# Altium PCB arduino_nano_min_sys.PcbDoc
Units mil, origin at the board's own origin, x right, y up, seen from the top; angles counter-clockwise.
Board outline 1755 x 3095 mil, 4 copper layers (Top Layer, GND_plane, 5V_plane, Bottom Layer), stack 23.756 mil thick; 34 components, 43 nets, 170 pads, 89 vias.
Unrouted connection lines stored in the file: 28.
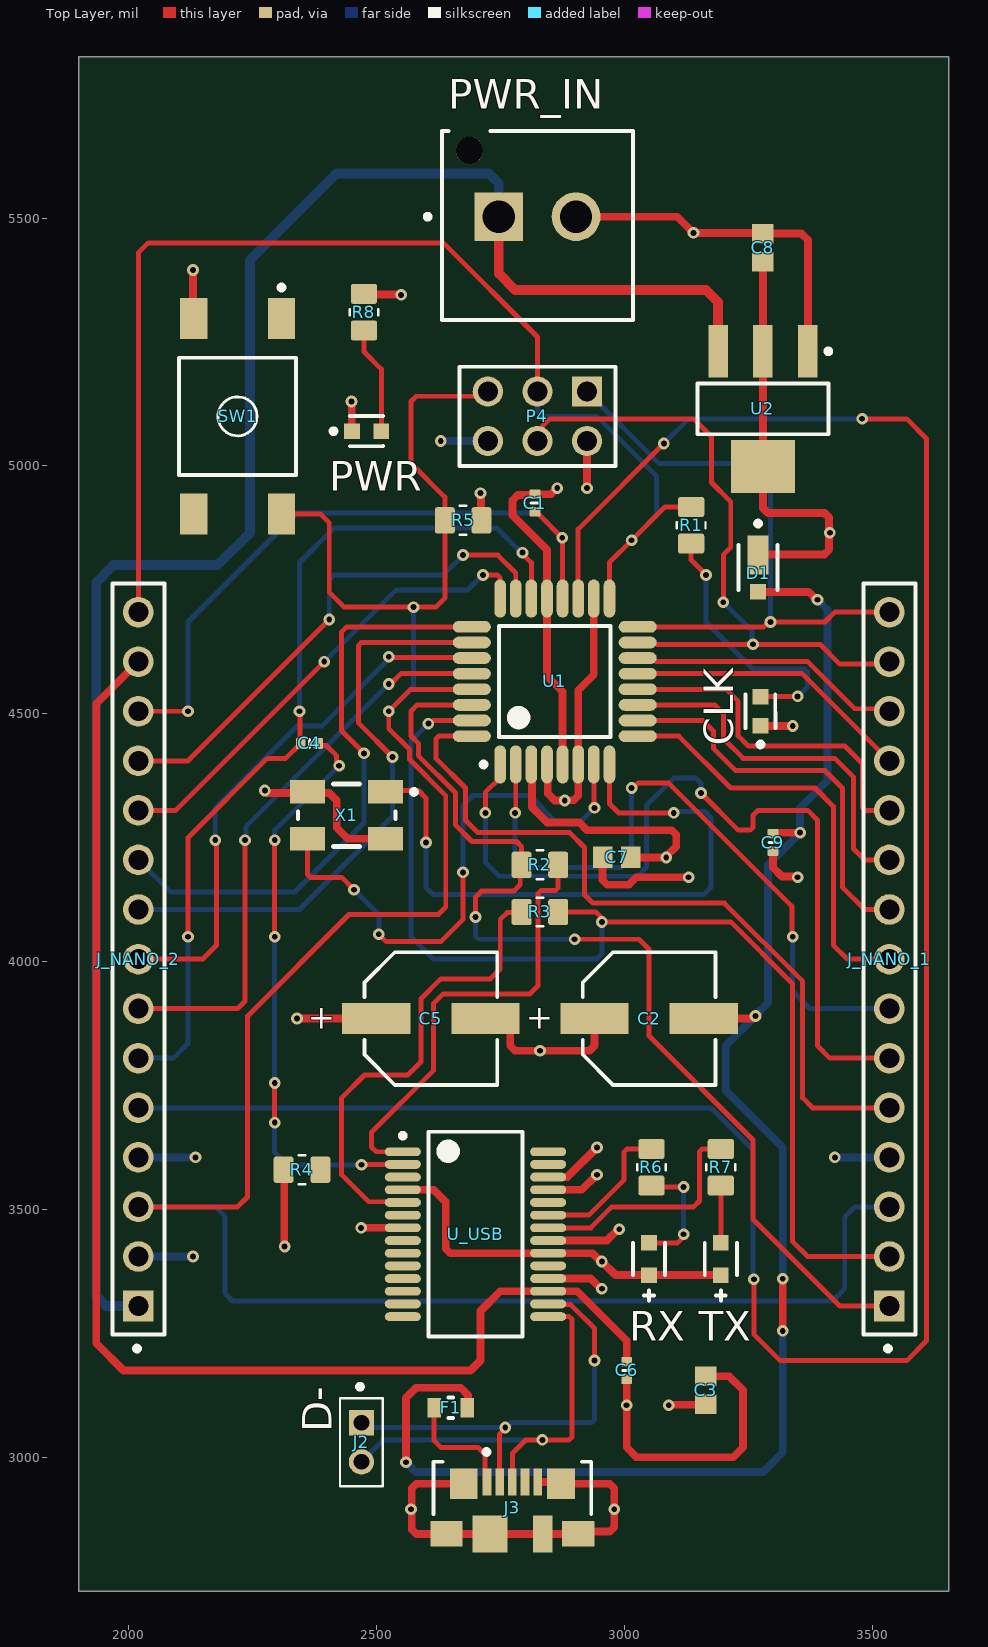
[diagram p0: Top Layer view]
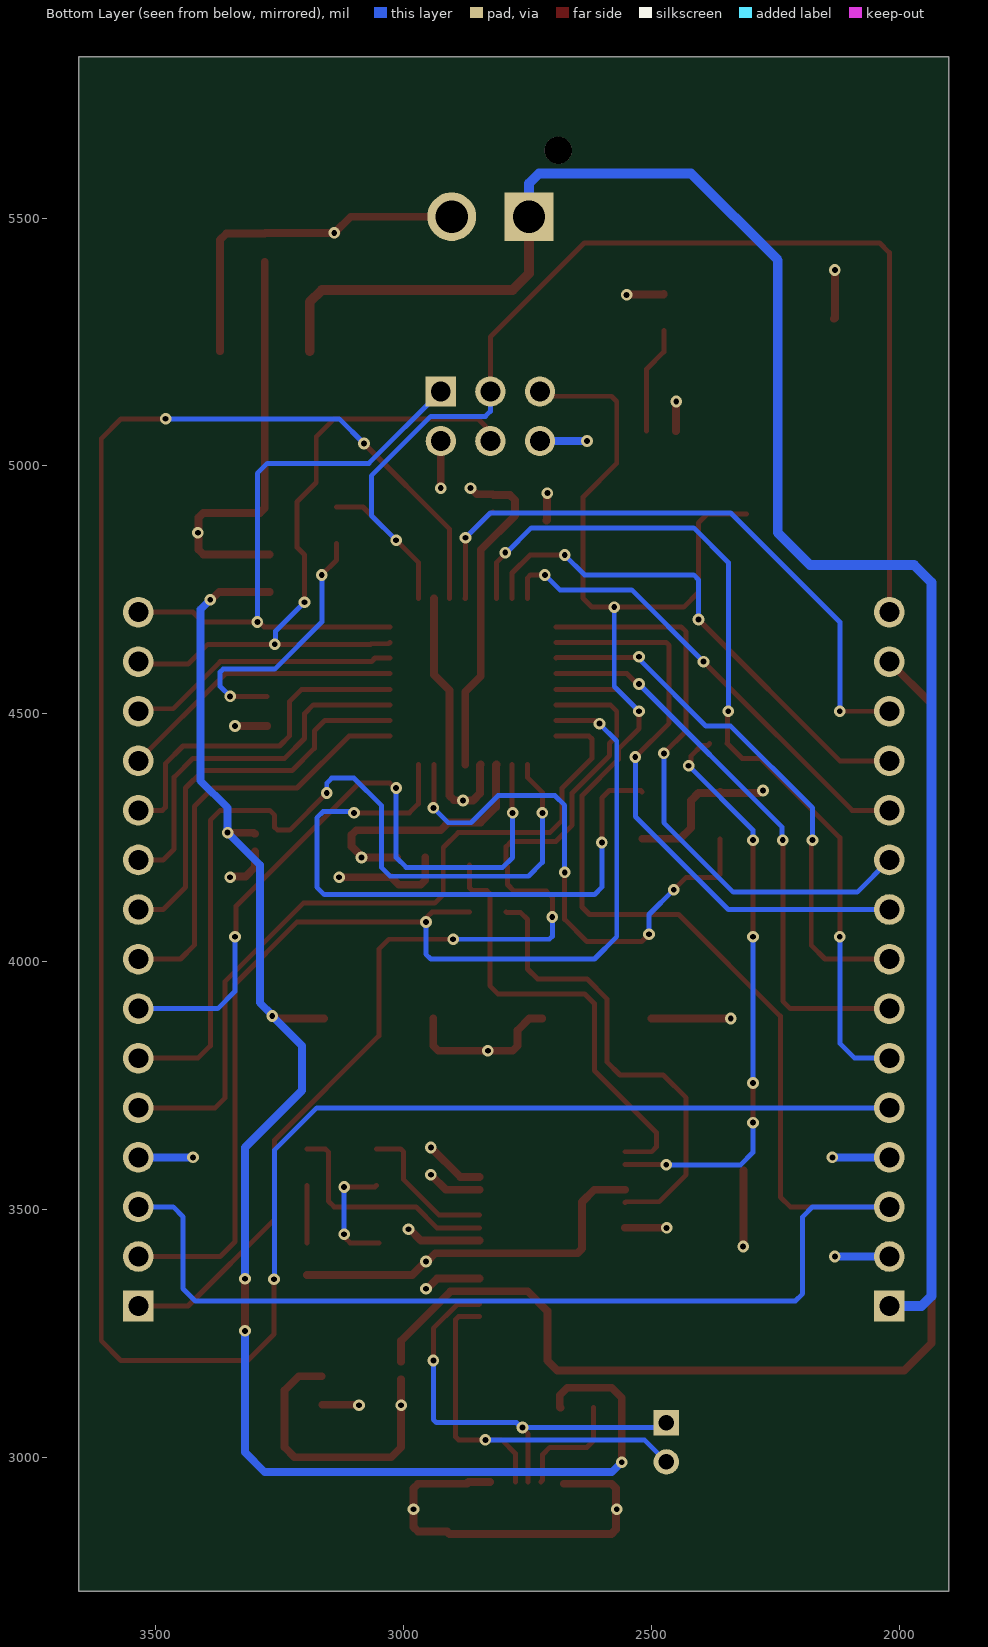
[diagram p1: Bottom Layer view, seen from below]
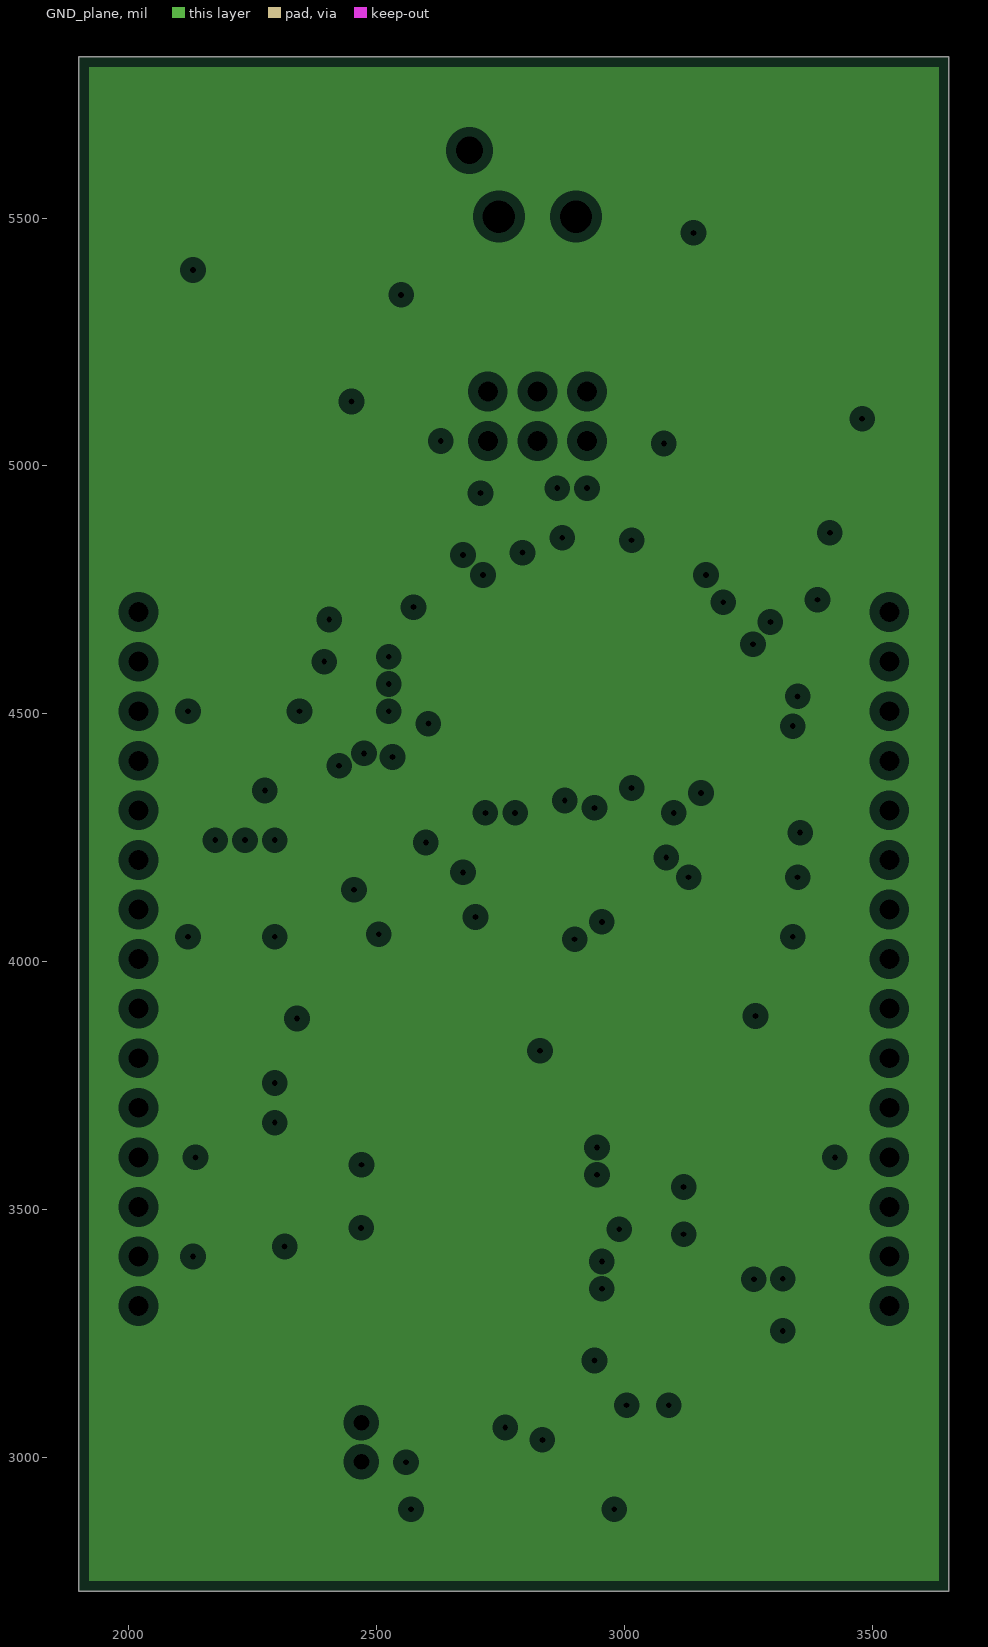
[diagram p2: GND_plane, clearances drawn from the general rule]
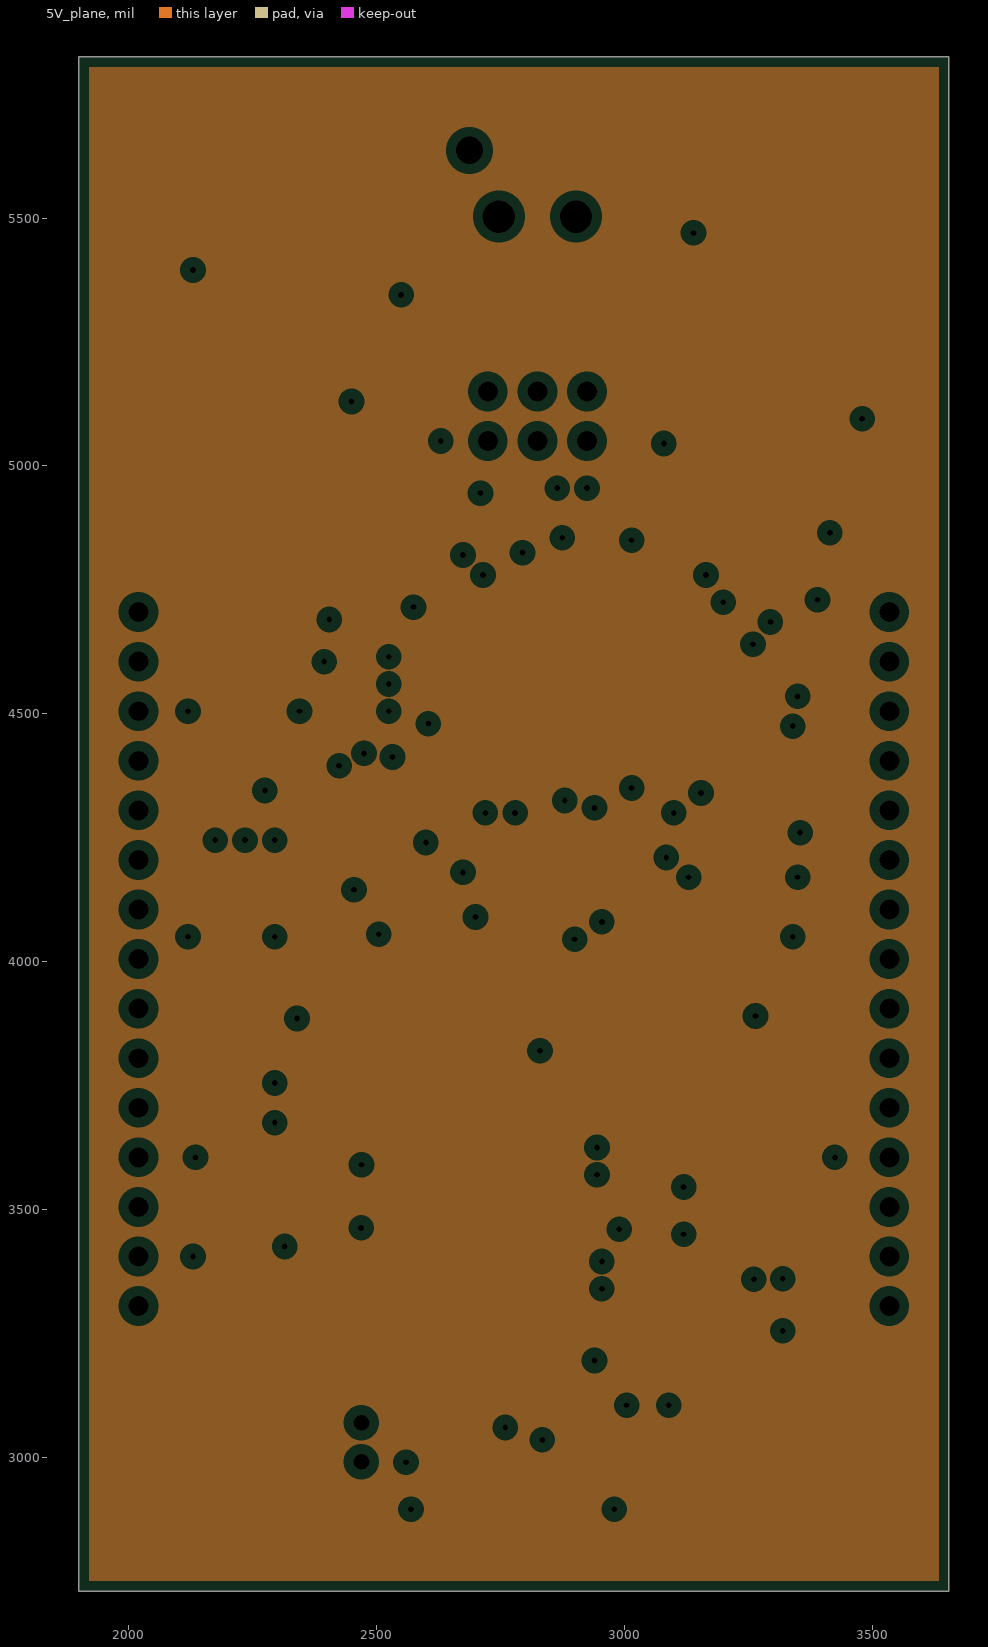
[diagram p3: 5V_plane, clearances drawn from the general rule]
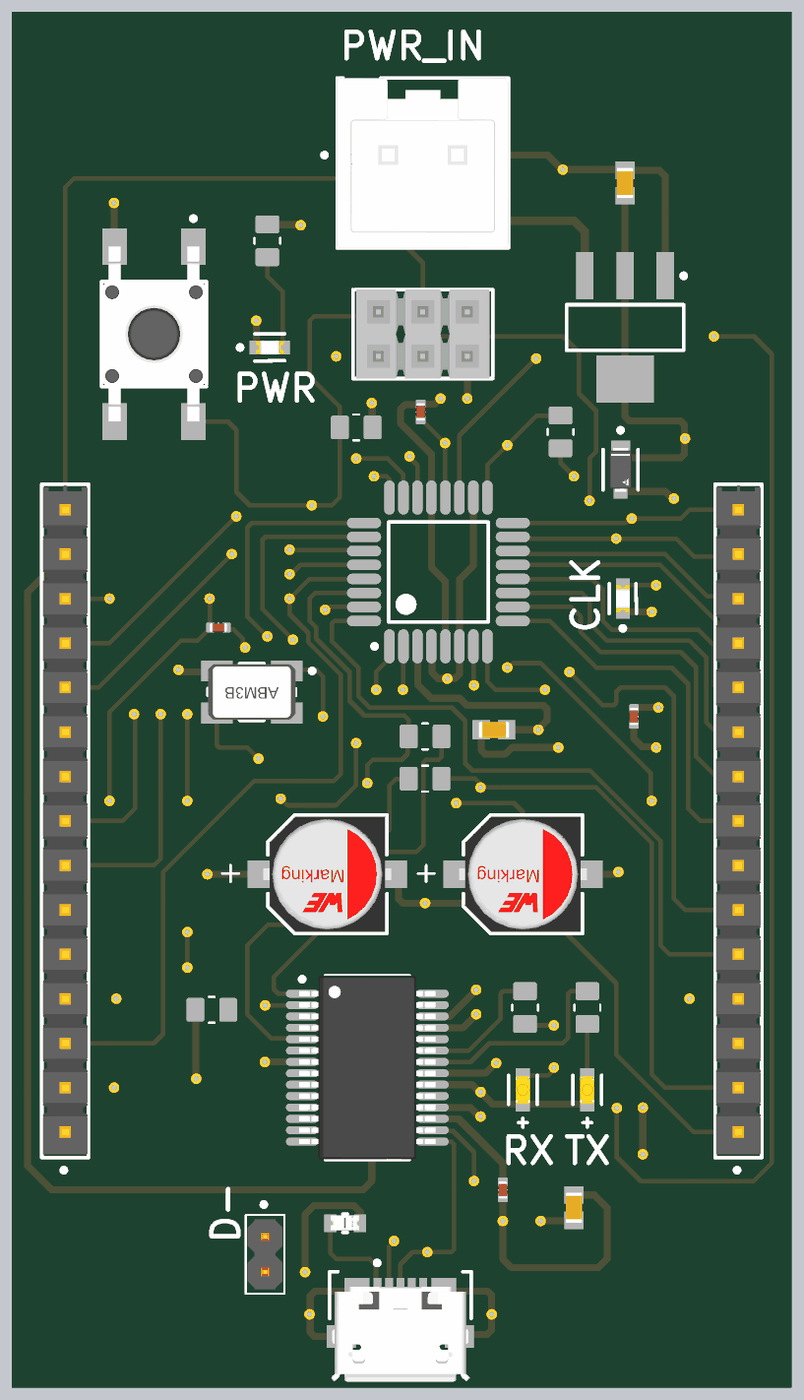
[diagram p4: 3D render of the assembled board from above, using the file's embedded part models]

## Layer stack, top to bottom
Top Solder: solder mask 0.4, Solder Resist, Dk 3.5
Top Layer: signal copper 1.4
Dielectric 2: prepreg 2.8, PP-006, Dk 4.1
GND_plane: plane copper 1.378, net GND
Dielectric 1: dielectric 12.6, FR-4, Dk 4.8
5V_plane: plane copper 1.378, net +5V
Dielectric 3: prepreg 2.8, PP-006, Dk 4.1
Bottom Layer: signal copper 1.4
Bottom Solder: solder mask 0.4, Solder Resist, Dk 3.5

## Board outline
1900,2730 1900,5825 3655,5825 3655,2730

## Design rules (kind name [scope] priority, off if disabled: settings)
AssemblyTestPointUsage [All] p1: isadvanced=TRUE
AssemblyTestpoint [All] p1: isadvanced=TRUE testpointundercomponent=TRUE minsize=40 maxsize=100 preferedsize=60 minholesize=0 maxholesize=40 preferedholesize=32 testpointgrid=1 usegrid=TRUE gridtolerance=0.01 allowsidetop=TRUE allowsidebottom=TRUE
Clearance Clearance_1 [OnMid vs OnMid] p1: gap=7.87 ignorepadtopadclearanceinfootprint=FALSE sourcerule=46 cellrowname=All cellrowtype=0 cellcolname=All cellcoltype=0 innerlayers=TRUE
Clearance Clearance_2 [(ExistsOnLayer('Top Layer') Or ExistsOnLayer('Bottom Layer')) vs (ExistsOnLayer('Top Layer') Or ExistsOnLayer('Bottom Layer'))] p2: gap=7.87 ignorepadtopadclearanceinfootprint=FALSE sourcerule=46 cellrowname=All cellrowtype=0 cellcolname=All cellcoltype=0 outerlayers=TRUE
Clearance [All] p3: gap=10 ignorepadtopadclearanceinfootprint=FALSE ismatrix=TRUE
ComponentClearance [All] p1: isadvanced=TRUE gap=10 collisioncheckmode=3 verticalgap=10 showdistances=FALSE
FabricationTestPointUsage [All] p1: isadvanced=TRUE valid=0 allowmultiple=FALSE
FabricationTestpoint [All] p1: isadvanced=TRUE side=3 testpointundercomponent=TRUE minsize=40 maxsize=100 preferedsize=60 minholesize=0 maxholesize=40 preferedholesize=32 testpointgrid=1 allowsidetop=TRUE allowsidebottom=TRUE usegrid=TRUE gridtolerance=0.01
FanoutControl Fanout_BGA [IsBGA] p1: isadvanced=TRUE bgadir=Out bgaviamode=Centered fanoutstyle=Auto fanoutdirection=Alternating viagrid=1 // Fanout_BGA (Default Rule)
FanoutControl Fanout_LCC [IsLCC] p2: isadvanced=TRUE bgadir=Out bgaviamode=Centered fanoutstyle=Auto fanoutdirection=Alternating viagrid=1 // Fanout_LCC (Default Rule)
FanoutControl Fanout_SOIC [IsSOIC] p3: isadvanced=TRUE bgadir=Out bgaviamode=Centered fanoutstyle=Auto fanoutdirection=Alternating viagrid=1 // Fanout_SOIC (Default Rule)
FanoutControl Fanout_Small [(CompPinCount < 5)] p4: isadvanced=TRUE bgadir=Out bgaviamode=Centered fanoutstyle=Auto fanoutdirection=OutThenIn viagrid=1 // Fanout_Small (Default Rule)
FanoutControl Fanout_Default [All] p5: isadvanced=TRUE bgadir=Out bgaviamode=Centered fanoutstyle=Auto fanoutdirection=Alternating viagrid=1 // Fanout_Default (Default Rule)
Height [All] p1: isadvanced=TRUE minheight=0 maxheight=1000 prefheight=500
HoleSize [All] p1: isadvanced=TRUE absolutevalues=TRUE maxlimit=100 minlimit=1 maxpercent=80.000 minpercent=20.000
HoleToHoleClearance [All] p1: isadvanced=TRUE gap=10 allowstackedmicrovias=TRUE
LayerPairs [All] p1: isadvanced=TRUE enforce=TRUE
MinimumSolderMaskSliver [All] p1: isadvanced=TRUE minsoldermaskwidth=10
NetAntennae [All] p1: isadvanced=TRUE netantennaetolerance=0
PasteMaskExpansion [All] p1: isadvanced=TRUE expansion=0
PlaneClearance [All] p1: isadvanced=TRUE clearance=20
PlaneConnect [All] p1: isadvanced=TRUE planeconnectstyle=Relief reliefexpansion=20 reliefentries=4 reliefconductorwidth=10 reliefairgap=10
PolygonConnect [All] p1: connectstyle=Relief reliefconductorwidth=10 reliefentries=4 polygonreliefangle="90 Angle" airgapwidth=10
RoutingCorners [All] p1: isadvanced=TRUE cornerstyle=45-Degree minsetback=100 maxsetback=100
RoutingPriority [All] p1: isadvanced=TRUE routingpriority=0
RoutingVias [All] p1: holewidth=11.81 width=23.62 viastyle="Through Hole" minholewidth=7.87 minwidth=15.75 maxholewidth=31.5 maxwidth=39.37
ShortCircuit [All] p1: isadvanced=TRUE allowed=FALSE
SilkToSilkClearance [All] p1: isadvanced=TRUE silktosilkclearance=10
SilkToSolderMaskClearance [IsPad] p1: isadvanced=TRUE minsilkscreentomaskgap=10 clearancetoexposedcopper=TRUE
SolderMaskExpansion [All] p1: isadvanced=TRUE expansion=0 istentingtop=FALSE
SupplyNets "Schematic Supply Nets_4" [InNet('+5V')] p1: isadvanced=TRUE voltage=0.000
SupplyNets "Schematic Supply Nets_3" [InNet('GND')] p2: isadvanced=TRUE voltage=0.000
SupplyNets "Schematic Supply Nets_2" [InNet('VIN')] p3: isadvanced=TRUE voltage=0.000
SupplyNets "Schematic Supply Nets_1" [InNet('3V3')] p4: isadvanced=TRUE voltage=0.000
SupplyNets "Schematic Supply Nets" [InNet('VUSB')] p5: isadvanced=TRUE voltage=0.000
UnRoutedNet [All] p1: isadvanced=TRUE
UnpouredPolygon [All] p1: isadvanced=TRUE
Width MaxMinWidth_1 [InNet('+5V')] p1: maxlimit=31.5 minlimit=11.81 preferedwidth=15.75 minimp=50.000000 maximp=50.000000 favimp=50.000000
Width MaxMinWidth_2 [InNet('3V3')] p2: maxlimit=31.5 minlimit=11.81 preferedwidth=15.75 minimp=50.000000 maximp=50.000000 favimp=50.000000
Width MaxMinWidth_3 [InNet('GND')] p3: maxlimit=31.5 minlimit=11.81 preferedwidth=15.75 minimp=50.000000 maximp=50.000000 favimp=50.000000
Width MaxMinWidth_4 [InNet('VIN')] p4: maxlimit=23.62 minlimit=11.81 preferedwidth=19.68 minimp=50.000000 maximp=50.000000 favimp=50.000000
Width MaxMinWidth_5 [InNet('VUSB')] p5: maxlimit=23.62 minlimit=11.81 preferedwidth=15.75 minimp=50.000000 maximp=50.000000 favimp=50.000000
Width [All] p6: maxlimit=10 minlimit=10 preferedwidth=10
4 further rules are at their usual default settings.

## Classes and differential pairs
component class U_USB: C4 C6 F1 J2 J3 R6 R7 RX TX U_USB
component class U_connector: J_NANO_1 J_NANO_2
component class U_arduino_nano: C1 C2 C3 C5 C7 C8 C9 CLK D1 P4 PWR_IN R1 R2 R3 R4 R5 R8 SW1 U1 U2 X1

## Components (designator, comment, footprint, x,y, rotation, side; value= is the part's Value field where it differs from the comment)
C1 "Capacitor 100nF +/-20% 25V 0402" CAPC0402(1005)60_L 2820,4925 r270 top value=100nF
C2 "4.7 uF" WCAP-ASLU_D6.3H5.5 3050.24,3885 r180 top
C3 "Capacitor 1uF +/- 10% 16V 0603" CAPC1608X90X35ML15T15 3165,3135 r90 top value=1µF
C4 "Capacitor 100nF +/-20% 25V 0402" CAPC0402(1005)60_L 2365,4440 r180 top value=100nF
C5 "4.7 uF" WCAP-ASLU_D6.3H5.5 2610,3885 r180 top
C6 "Capacitor 100nF +/-20% 25V 0402" CAPC0402(1005)60_L 3005,3175 r270 top value=100nF
C7 "Capacitor 1uF +/- 10% 16V 0603" CAPC1608X90X35ML15T15 2985,4210 r0 top value=1µF
C8 "Capacitor 1uF +/- 10% 16V 0603" CAPC1608X90X35ML15T15 3280,5440 r270 top value=1µF
C9 "Capacitor 100nF +/-20% 25V 0402" CAPC0402(1005)60_L 3300,4240 r270 top value=100nF
CLK "" FP-5973901831F-MFG 3275,4505 r90 top
D1 "MSS1P3L-M3/89A" FP-96591-MFG 3270,4795 r270 top value=65pF
F1 "MF-FSMF050X-2" FP-MF-FSMF-MFG 2650,3100 r0 top value=0.1-0.8Ω
J2 "NRPN021PAEN-RC" NRPN021PAEN-RC_MFG 2470,3030 r270 top
J3 "473460001" FP-473460001-MFG 2774.41,2859.06 r0 top
J_NANO_1 "TSW-115-07-G-S" FP-TSW-115-07-G-S-MFG 3535,4005 r270 top
J_NANO_2 "TSW-115-07-G-S" FP-TSW-115-07-G-S-MFG 2020,4005 r270 top
P4 "TSW-103-08-T-D" SMTC-TSW-103-08-X-D 2925,5150 r180 top
PWR "" FP-5973901831F-MFG 2480.47,5070 r0 top
PWR_IN "B2P-VH-FB-B(LF)(SN)" FP-B2P-VH-FB-B_LF_SN-MFG 2825,5485 r180 top
R1 "ERJP06J102V_with_model" RESC2012X70N 3135,4880 r270 top value=1k
R2 "ERJP06J102V_with_model" RESC2012X70N 2830,4195 r0 top value=1k
R3 "ERJP06J102V_with_model" RESC2012X70N 2830,4100 r180 top value=1k
R4 "ERJP06J102V_with_model" RESC2012X70N 2350,3580 r0 top value=1k
R5 "ERJP06J102V_with_model" RESC2012X70N 2675,4890 r0 top value=1k
R6 "ERJP06J102V_with_model" RESC2012X70N 3055,3585 r90 top value=1k
R7 "ERJP06J102V_with_model" RESC2012X70N 3195,3585 r90 top value=1k
R8 "ERJP06J102V_with_model" RESC2012X70N 2475,5310 r270 top value=1k
RX "" FP-APTD1608SYC-J3-MFG 3050,3400 r270 top
SW1 "1301.9320" FP-1301_9320-MFG 2220,5100 r270 top
TX "" FP-APTD1608SYC-J3-MFG 3195,3400 r270 top
U1 "ATmega328P-AU" 32A_M 2860,4565 r90 top
U2 "LM1117IMPX-5.0/NOPB" MP04A_M 3280,5115 r270 top
U_USB "FT232RL" FTDI-SSOP-28_M 2700,3450 r0 top
X1 "ABM3B-16.000MHZ-B2-T" ABRA-ABM3B-4_V 2440,4295 r180 top

## Footprints (in the part's own frame and the unit in brackets; to place one, negate y for a bottom-side part, rotate by r counter-clockwise, add the part's x,y. Pads: shape width x height; smd on the part's side, far side on the other; paste and mask are expansions set on the pad)
32A_M [mm] "Thin QFP, 32-Leads, Body 7x7mm, Pitch 0.8mm, IPC Low Density"
  oval 1.95x0.6 smd: 1(-4.25,2.8) 2(-4.25,2) 3(-4.25,1.2) 4(-4.25,0.4) 5(-4.25,-0.4) 6(-4.25,-1.2) 7(-4.25,-2) 8(-4.25,-2.8) 17(4.25,-2.8) 18(4.25,-2) 19(4.25,-1.2) 20(4.25,-0.4) 21(4.25,0.4) 22(4.25,1.2) 23(4.25,2) 24(4.25,2.8)
  oval 0.6x1.95 smd: 9(-2.8,-4.25) 10(-2,-4.25) 11(-1.2,-4.25) 12(-0.4,-4.25) 13(0.4,-4.25) 14(1.2,-4.25) 15(2,-4.25) 16(2.8,-4.25) 25(2.8,4.25) 26(2,4.25) 27(1.2,4.25) 28(0.4,4.25) 29(-0.4,4.25) 30(-1.2,4.25) 31(-2,4.25) 32(-2.8,4.25)
  silkscreen extent -4.37,-2.85 2.85,3.77, body extent -3.5,-3.5 3.5,3.5, height 1.2
ABRA-ABM3B-4_V [mm] "SMD, 4-Leads, Body 5x3.2mm"
  rect 1.8x1.2 smd: 1(-2,-1.2) 2(2,-1.2) 3(2,1.2) 4(-2,1.2)
  silkscreen extent -3.58,-1.6 2.5,1.6, body extent -2.5,-1.59 2.5,1.59, height 1.13
CAPC0402(1005)60_L [mm] "Chip Capacitor, Body 1.0x0.5mm, Height 0.6mm, IPC High Density"
  rrect25% 0.5x0.55 smd: 1(-0.45,0) 2(0.45,0)
  silkscreen extent 0,-0.2 0,0.2, body extent -0.5,-0.25 0.5,0.25, height 0.6
CAPC1608X90X35ML15T15 [mm] "Chip Capacitor, 2-Leads, Body 1.75x0.95mm, IPC Low Density"
  rect 1x1.1 smd: 1(-0.725,0) 2(0.725,0)
  body extent -0.87,-0.48 0.87,0.48, height 0.9
FP-1301_9320-MFG [mm]
  rect 2.1x1.4 smd paste+0 mask+0: 1(-5,2.25) 2(5,2.25) 3(-5,-2.25) 4(5,-2.25)
  silkscreen extent -6.72,-3 3,3, body extent -6.15,-3.1 6.15,3.1, height 0.25
FP-96591-MFG [mm]
  rect 2x1.1 smd paste+0 mask+0: 1(-0.65,0)
  rect 0.8x0.8 smd paste+0 mask+0: 2(1.25,0)
  silkscreen extent -2.37,-1 1.15,1, body extent -1.75,-0.8 1.75,0.8, height 0.25
FP-473460001-MFG [mm]
  rect 0.45x1.38 smd paste+0 mask+0: 1(-1.3,2.31) 2(-0.65,2.31) 3(0,2.31) 4(0.65,2.31) 5(1.3,2.31)
  rect 1.425x1.55 smd paste+0 mask+0: 6(-2.488,2.225) 7(2.488,2.225)
  rect 1.65x1.3 smd paste+0 mask+0: 8(-3.375,-0.35) 11(3.375,-0.35)
  rect 1.8x1.9 smd paste+0 mask+0: 9(-1.15,-0.35)
  rect 1x1.9 smd paste+0 mask+0: 10(1.55,-0.35)
  silkscreen extent -4.05,0.67 4.05,3.97, body extent -4.3,-2.48 4.3,3.45, height 0.25
FP-5973901831F-MFG [mm]
  rect 0.8x0.8 smd paste+0 mask+0: 1(-0.75,0) 2(0.75,0)
  silkscreen extent -1.82,-0.77 0.85,0.77, body extent -1.25,-0.56 1.25,0.56, height 0.25
FP-APTD1608SYC-J3-MFG [mm]
  rect 0.8x0.8 smd paste+0 mask+0: 1(-0.825,0) 2(0.825,0)
  silkscreen extent -0.82,-0.82 2.12,0.82, body extent -1.33,-0.58 1.33,0.58, height 0.25
FP-B2P-VH-FB-B_LF_SN-MFG [mm]
  rect 2.5x2.5 hole 1.65 paste-2539.97 mask+0: 1(1.98,-0.45)
  round 2.5 hole 1.65 paste-2539.97 mask+0: 2(-1.98,-0.45)
  round 1.4 hole 1.4 unplated paste-2539.97 mask+0: ""(3.48,-3.85)
  silkscreen extent -4.9,-4.85 5.75,4.85, body extent -5,-4.95 5,4.95, height 0.25
FP-MF-FSMF-MFG [mm]
  rect 0.7x1 smd paste+0 mask+0: 1(-0.85,0) 2(0.85,0)
  silkscreen extent -0.13,-0.53 0.13,0.53, body extent -1.3,-0.63 1.3,0.63, height 0.25
FP-TSW-115-07-G-S-MFG [mm]
  rect 1.57x1.57 hole 1.02 paste-2539.97 mask+0: 1(17.78,0)
  round 1.57 hole 1.02 paste-2539.97 mask+0: 2(15.24,0) 3(12.7,0) 4(10.16,0) 5(7.62,0) 6(5.08,0) 7(2.54,0) 8(0,0) 9(-2.54,0) 10(-5.08,0) 11(-7.62,0) 12(-10.16,0) 13(-12.7,0) 14(-15.24,0) 15(-17.78,0)
  silkscreen extent -19.24,-1.34 20.08,1.34, body extent -19.34,-1.44 19.34,1.44, height 0.25
FTDI-SSOP-28_M [mm] "SOP, 28-Leads, Body 10.5x5.6mm, Pitch 0.65mm, IPC Low Density"
  oval 1.85x0.45 smd: 1(-3.725,4.225) 2(-3.725,3.575) 3(-3.725,2.925) 4(-3.725,2.275) 5(-3.725,1.625) 6(-3.725,0.975) 7(-3.725,0.325) 8(-3.725,-0.325) 9(-3.725,-0.975) 10(-3.725,-1.625) 11(-3.725,-2.275) 12(-3.725,-2.925) 13(-3.725,-3.575) 14(-3.725,-4.225) 15(3.725,-4.225) 16(3.725,-3.575) 17(3.725,-2.925) 18(3.725,-2.275) 19(3.725,-1.625) 20(3.725,-0.975) 21(3.725,-0.325) 22(3.725,0.325) 23(3.725,0.975) 24(3.725,1.625) 25(3.725,2.275) 26(3.725,2.925) 27(3.725,3.575) 28(3.725,4.225)
  silkscreen extent -3.85,-5.25 2.4,5.25, body extent -3.9,-5.25 3.9,5.25, height 2
MP04A_M [mm] "SOT223, 4-Leads, Body 6.5x3.5mm, Pitch 2.3mm, Lead Span 7mm, IPC Low Density"
  rect 2.7x1 smd: 1(-2.95,2.3) 2(-2.95,0) 3(-2.95,-2.3)
  rect 2.7x3.3 smd: 4(2.95,0)
  silkscreen extent -3.07,-3.35 1.3,3.48, body extent -1.86,-3.35 1.86,3.35, height 1.8
NRPN021PAEN-RC_MFG [mm] "Recommended Land Pattern"
  rect 1.3x1.3 hole 0.8 paste-2539.97 mask+0: 1(-1,0)
  round 1.3 hole 0.8 paste-2539.97 mask+0: 2(1,0)
  silkscreen extent -2.97,-1.1 2.25,1.1, body extent -2,-1 2,1, height 5.95
RESC2012X70N [mm] "Chip Resistor, 2-Leads, Body 2,00x1,25mm, IPC Medium Density"
  rrect25% 1.025x1.35 smd: 1(-0.937,0) 2(0.938,0)
  silkscreen extent -0.16,-0.74 0.16,0.74, body extent -1,-0.63 1,0.63, height 0.7
SMTC-TSW-103-08-X-D [mm] ".025 SQ Post Terminal Strip Assembly, 2x3 Pins, Vertical, 2.54mm Pitch, Male"
  rect 1.55x1.55 hole 1.02: 1(0,0)
  round 1.55 hole 1.02: 2(0,2.54) 3(2.54,0) 4(2.54,2.54) 5(5.08,0) 6(5.08,2.54)
  silkscreen extent -1.46,-1.27 6.54,3.81, body extent -1.27,-1.27 6.35,3.81, height 8.38
WCAP-ASLU_D6.3H5.5 [mm] "Aluminum Electrolytic Capacitors, body diameter 6.3mm"
  rect 3.5x1.6 smd: 1(2.8,0) 2(-2.8,0)
  silkscreen extent -3.4,-3.4 3.4,3.4, body extent -3.65,-3.3 3.65,3.3, height 5.5

## Part data
C1 C4 C6 C9: library part CMP-001-00065-4, "Chip Capacitor, 100nF +/-20%, 25V, 0402, Thickness 0.6 mm", Case/Package=0402, Max Operating Temperature=85°C, Min Operating Temperature=-55°C, Tolerance=10%, Voltage Rating=25V, Mounting Technology=SMT, Pins=2
C2 C5: library part CMP-03913-54202521-2, "WCAP-ASLU Aluminum Electrolytic Capacitors", Capacitance=4.7µF, Case/Package=Radial, Insulation Resistance=16.6667MΩ, Leakage Current=500nA, Max Operating Temperature=85°C, Min Operating Temperature=-40°C, Ripple Current=20mA, Tolerance=20%, Voltage Rating=50V, Diameter=6.3mm, Height=5.5mm, Height - Seated (Max)=5.5118mm, Length=5.5mm, Life (Hours)=1000hours, Mount="Surface Mount", Polarity=Polar, REACH SVHC=Unknown, Ripple Current (AC)=20mA, RoHS=Compliant, Voltage Rating (DC)=50V, Width=6.6mm
C3 C7 C8: library part CMP-001-00004-6, "Chip Capacitor, 1 uF, +/- 10%, 16 V, 0603 (1608 Metric)", Capacitor Type=Ceramic, Case/Package=0603, Max Operating Temperature=125°C, Min Operating Temperature=-55°C, Tolerance=10%, Voltage Rating=16V, Mounting Technology=SM, Pins=2, RoHS Compliant=True
CLK PWR: library part CMP-15384-000002-3, "LED COOL WHITE 2SMD", Case Code (Imperial)=0603, Case Code (Metric)=1608, Color=White, Forward Current=10mA, Forward Voltage=3.4V, Lens Color=Yellow, Max Operating Temperature=80°C, Min Operating Temperature=-20°C, Power Dissipation=70mW, Reverse Voltage=5V, Case/Package=0603, Height=550µm, Illumination Color=White, Length=1.6mm, Lens Style="Diffused, Rectangular, Tinted", Luminous Intensity=240mcd, Mount="Surface Mount", NexarPartId=10598902, Packaging="Cut Tape", Power Rating=70mW, REACH SVHC="No SVHC", RoHS=Compliant, Test Current=10mA, Viewing Angle=130°, Width=800µm
D1: library part CMP-02539-000006-1, "DIODE SCHOTTKY 30V 1A MICROSMP", Capacitance=65pF, Forward Current=1A, Manufacturer=Vishay, Max Junction Temp=+150°C, Max Repetitive Reverse Voltage=30V, Max Surge Forward Current=25A, Package=96591, Peak Reverse Current=15uA, Temperature="-55°C to +150°C", Temperature Range Low=-55°C, Automotive=No, Category=Diode, ComponentLink2Description=Datasheet, ComponentLink2URL=http://www.vishay.com/docs/89020/mss1p3l.pdf, Device Class L1="Discrete Semiconductors", Device Class L2=Diodes, Device Class L3="Schottky Diodes", Digikey Description="DIODE SCHOTTKY 30V 1A MICROSMP", Footprint Url=http://www.vishay.com/docs/96591/microsmp_do-219ad_fredpt.pdf, Height=0.73mm, Lead Free=Yes, Manufacturer Part Number=MSS1P3L-M3/89A, Mouser Description="Schottky Diodes & Rectifiers 1.0 Amp 30 Volt", Octopart=https://octopart.com/mss1p3l-m3%2F89a-vishay-42670898, RoHS=TRUE, Temperature Range High=+150°C
F1: library part CMP-07400-000010-1, "PTC RESET FUSE 6V 500MA 0603", Ambient Temperature Range High=+85°C, Ambient Temperature Range Low=-40°C, Current Rating=40A, Hold Current=0.5A, Manufacturer="Bourns Inc.", Package=MF-FSMF, Resistance=0.1-0.8Ω, Temperature="-40°C to +85°C", Trip Current=1A, Voltage Rating=6V, Automotive=No, Category=Fuse, ComponentLink2Description=Datasheet, ComponentLink2URL=https://www.bourns.com/docs/Product-Datasheets/mffsmf.pdf, Device Class L1="Circuit Protection", Device Class L2="PTC Resettable Fuses", Device Class L3=unset, Digikey Description="PTC RESET FUSE 6V 500MA 0603", Height=1mm, Lead Free=Yes, Manufacturer Part Number=MF-FSMF050X-2, Mouser Description="Resettable Fuses - PPTC 6volts 40amps", Octopart=https://octopart.com/mf-fsmf050x-2-bourns-10470804, RoHS=TRUE, Temperature Range High=+85°C, Temperature Range Low=-40°C, Trip Time=0.1s
J2: library part CMP-00595-12086179-1, "Male 2 C, Straight, .079\" CC; 3.60mm head/2.80mm tail No Mt.; Nylon 6-T, Brass, 105 C", Color=Black, Contact Resistance=20mΩ, Current Rating=1A, Insulation Resistance=5GΩ, Max Operating Temperature=105°C, Min Operating Temperature=-40°C, Voltage Rating=150V, ComponentLink2Description="Datasheet URL", ComponentLink2URL=https://drawings-pdf.s3.amazonaws.com/10531.pdf, ComponentLink3Description="Manufacturer's Package Drawing", ComponentLink3URL=https://drawings-pdf.s3.amazonaws.com/10531.pdf, Connector Type="Male Pin", Contact Material=Brass, Contact Mating Length=3.5814mm, Contact Plating=Gold, Gender=Male, HelpURL=https://drawings-pdf.s3.amazonaws.com/10531.pdf, Lead Free="Lead Free", Lifecycle Status=Production, Material=Nylon, Mount="Through Hole", Number of Contacts=2, Number of Positions=2, Number of Rows=1, Packaging=Bulk, Pitch=2.0066mm, REACH SVHC=Yes, RoHS=Compliant, Terminal Pitch=2mm, Termination=Solder
J3: library part CMP-2000-05246-2, "CONN RCPT USB2.0 MICRO B SMD R/A", Current Rating=1.8A, Manufacturer=Molex, Package=0, Temperature="-30°C to +85°C", Temperature Range High=+85°C, Temperature Range Low=-30°C, Voltage Rating=30V, Automotive=No, Category=Conn, ComponentLink2Description=Datasheet, ComponentLink2URL=https://www.molex.com/webdocs/datasheets/pdf/en-us/0473460001_IO_CONNECTORS.pdf, Conn Orientation="Right Angle", Contact Material=Gold,Nickel, Device Class L1=Connectors, Device Class L2="USB Connectors", Device Class L3=unset, Digikey Description="CONN RCPT USB2.0 MICRO B SMD R/A", Footprint Url=https://www.molex.com/pdm_docs/sd/473460001_sd.pdf, Height=2.945mm, Is Female=yes, Lead Free=Yes, Manufacturer Part Number=473460001, Number of Contacts=5, Octopart=https://octopart.com/47346-0001-molex-7164928, Pitch=0.65mm, RoHS=TRUE, Shielding=true, Usb Standard="USB 2.0"
J_NANO_1 J_NANO_2: library part CMP-02766-000090-1, "CONN HEADER VERT 15POS 2.54MM", Manufacturer=SAMTEC, Temperature="-55°C to +125°C", Temperature Range High=+125°C, Temperature Range Low=-55°C, Automotive=No, Category=Conn, ComponentLink2Description=Datasheet, ComponentLink2URL=http://suddendocs.samtec.com/catalog_english/tsw_th.pdf, Conn Gender=Male, Conn Orientation=Vertical, Contact Material=Gold,Nickel, Device Class L1=Connectors, Device Class L2="Headers and Wire Housings", Device Class L3=unset, Digikey Description="CONN HEADER VERT 15POS 2.54MM", Footprint Url=http://suddendocs.samtec.com/prints/tsw-xxx-xx-x-x-xx-xxx-footprint.pdf, Height=8.71mm, Lead Free=Yes, Manufacturer Part Number=TSW-115-07-G-S, Number of Contacts=15, Number of Rows=1, Octopart=https://octopart.com/tsw-115-07-g-s-samtec-272210, Package=TSW-115-07-G-S, Pitch=2.54mm, RoHS=TRUE
P4: library part CMP-1024-00335-1, "0.025\" SQ Post Header, Through-hole, Vertical, -55 to 105 degC, 2.54 mm Pitch, 6-Pin, Male, RoHS", Manufacturer=Samtec, Temperature Range="-55 to 105 degC", ComponentLink1Description="Manufacturer URL", ComponentLink1URL=http://www.samtec.com, ComponentLink2Description=Datasheet, ComponentLink2URL=http://www.samtec.com/documents/webfiles/pdf/TSW_TH.PDF, ComponentLink3Description="Package Specification", ComponentLink3URL=http://www.samtec.com/documents/webfiles/cpdf/TSW-XXX-XX-XXX-X-XX-XXX-MKT.pdf, DatasheetVersion=F-214, Mounting Technology=Through-hole, Orientation=Vertical, PackageDescription=".025[0.64] SQ. Post Terminal Strip Assembly", PackageReference=TSW-103-08-X-D, PackageVersion="DM, 8/1988", PartNumber=TSW-103-08-T-D, Pitch="2.54 mm", RoHS=True
PWR_IN: library part CMP-17439-000031-1, "CONN HEADER VERT 2POS 3.96MM", Color=Natural, Package Quantity=250, Connector Type="Male Pin", Contact Plating=Tin, Contact Type="Male Pin", Fastening Type=Ramp, Lead Free="Lead Free", Mount="Through Hole", Number of Positions=2, Number of Rows=1, Packaging=Bulk, Pitch=0.156inch, Series=VH, Termination=Solder
R1 R2 R3 R4 R5 R6 R7 R8: library part CMP-009-00186-3, "Res Thick Film 0805 1K Ohm 5% 0.5W(1/2W) ±200ppm/C Pad SMD Automotive T/R", Case/Package=0805, Max Operating Temperature=155°C, Min Operating Temperature=-55°C, Tolerance=5%, Voltage Rating=400V, Mounting Technology="Surface Mount"
RX TX: library part CMP-44529-000016-1, "LED YELLOW CLEAR CHIP SMD", Case Code (Imperial)=0603, Case Code (Metric)=1608, Color=Yellow, Forward Current=20mA, Forward Voltage=2V, Lens Color=Colorless, Max Operating Temperature=85°C, Min Operating Temperature=-40°C, Package Quantity=2000, Case/Package=0603, Dominant Wavelength=590nm, Height=0.95mm, Illumination Color=Yellow, Lead Free="Lead Free", Length=1.6mm, Lens Style=Clear, Lens Transparency=Clear, Luminous Intensity=900mcd, Mount="Surface Mount", Packaging="Tape and Reel", Test Current=20mA, Viewing Angle=60°, Width=0.8mm
SW1: library part CMP-26321-000001-1, "SWITCH TACTILE SPST-NO 0.05A 12V", Contact Current Rating=50mA, Contact Resistance=100mΩ, Manufacturer=Schurter, Operating Force=1.6N, Package=0, Temperature="-20°C to +70°C", Temperature Range High=+70°C, Temperature Range Low=-20°C, Voltage Rating Dc=12V, Automotive=No, Category=Switch, ComponentLink2Description=Datasheet, ComponentLink2URL=https://www.schurter.com/en/datasheet/typ_6x6_mm_tact_switches.pdf, Device Class L1=Electromechanical, Device Class L2=Switches, Device Class L3="Tactile Switches", Digikey Description="SWITCH TACTILE SPST-NO 0.05A 12V", Electromechanical Life=100000Cycles, Height=12.5mm, Lead Free=Yes, Manufacturer Part Number=1301.9320, Mount="Surface Mount", Octopart=https://octopart.com/1301.9320-schurter-6627962, RoHS=TRUE, Throw Configuration=SPST-NO
U1: library part CMP-0095-00269-2, "8-bit AVR Microcontroller, 32KB Flash, 1KB EEPROM, 2KB SRAM, 32-pin TQFP, Industrial Grade (-40°C to 85°C)", Code_JEDEC=MS-026-ABA, ComponentLink1Description="Manufacturer URL", ComponentLink1URL=http://www.atmel.com/, ComponentLink2Description="ATmega48A/48PA/88A/88PA/168A/168PA/328/328P Datasheet", ComponentLink2URL=http://www.atmel.com/dyn/resources/prod_documents/doc8271.pdf, ComponentLink3Description="ATmega48A/48PA/88A/88PA/168A/168PA/328/328P Summary", ComponentLink3URL=http://www.atmel.com/dyn/resources/prod_documents/8271S.pdf, DatasheetVersion="revD, May-2011", PackageDescription="32-Lead, 7x7x1.0 mm Body, 0.8mm Lead Pitch, Thin Profile Plastic Quad Flat Package (TQFP)", PackageReference=32A, PackageVersion="revC, Oct-2010", RevisionNote="DatasheetVersion & PackageVersion updated. URLs added."
U2: library part CMP-0062-01628-3, "800mA Low-Dropout Linear Regulator, 4-pin SOT-223, Pb-Free", Manufacturer="National Semiconductor", PackageTopMarking=XYTT*N06B, PowerWise=N, Code_IPC=SOT223-4, Code_JEDEC=TO-261-AA, ComponentLink1Description="Manufacturer URL", ComponentLink1URL=http://www.national.com/, ComponentLink2Description="LM1117 Datasheet", ComponentLink2URL=http://www.national.com/ds/LM/LM1117.pdf, ComponentLink3Description="LM1117 Web Page", ComponentLink3URL=http://www.national.com/pf/LM/LM1117.html, ComponentLink4Description="MP04A Package Page", ComponentLink4URL=http://www.national.com/packaging/folders/mp04a.html, CompType="LDO IC", DatasheetVersion=Apr-2006, High-Reliability=Y, PackageDescription="Molded SOT-223, 6.50 x 3.56 x 1.6mm Body, 4 Lead, 2.3mm Pitch", PackageReference=MP04A, PackageVersion="revB, Apr-2003", PartNumber=LM1117IMPX-5.0/NOPB, PinCount=4, RevisionNote="SCH symbol layout adjusted", RoHS=Y
U_USB: library part CMP-2000-05029-1, "IC USB FS SERIAL UART 28-SSOP", Manufacturer=FTDI, Maximum Operating Temperature=+85degC, Minimum Operating Temperature=-40degC, Package Type=SSOP, Datasheet URL=http://datasheet.octopart.com/FT232RL-FTDI-datasheet-120501.pdf, Datasheet Version="Rev. 1.04, 02/2006", Dimensions=10.2x5.3x1.75mm, Height=1.75mm, Length=10.2mm, Manufacturer URL=http://www.ftdichip.com/, Maximum Data Rate=3MBd, Mounting Type=SurfaceMount, Number of Channels per Chip=1, Pin Count=28, Receive FIFO=256B, Transmit FIFO=128B, Width=5.3mm
X1: library part CMP-003-00017-2, "Ceramic SMD Crystal, 16 MHz, +/- 20 ppm, 18 pF, -20 to 70 degC, 4-Pin SMD, RoHS, Tape and Reel", Case/Package=CSMD, Frequency=16MHz, Frequency Tolerance=20ppm, Load Capacitance=18pF, Manufacturer=Abracon, Max Operating Temperature=70°C, Min Operating Temperature=-20°C, Package Description="4-Pin Surface Mount Device, Body 5 x 3.2 mm", Package Quantity=1000, Package Reference=ABM3B, Resistance=50Ohm, Datasheet URL=http://www.abracon.com/Resonators/abm3b.pdf, Datasheet Version=Aug-15, ESR=50, Manufacturer URL=http://www.abracon.com/, Mounting Technology=SM, Packaging=TapeandReel, Pins=4, RoHS Compliant=True, Tolerance=20ppm

## Via types
v1: diameter 23.62, hole 11.81, Top Layer to Bottom Layer, 89 vias

## Nets (pads, with @x,y where several pads share a name; then routed paths per layer and width w, separated by ;. In a path a pad name is that pad's centre, name@x,y a point inside that pad or via, vN(x,y) a via of type N, cw(c..) or ccw(c..) an arc to the next point about the centre after c; other vN are vias at no path point)
3V3: C6.1 J_NANO_2.14 U_USB.17 | length 2711.4
  Top Layer w15.75: J_NANO_2.14 1935,4520 1935,3230 1990,3175 2690,3175 2710,3195 2710,3295 2749.84,3334.84 U_USB.17 2905.16,3334.84 3005,3235 C6.1
+5V: C3.1 C5.1 C7.1 C8.2 D1.1 J_NANO_2.4 P4.2 R5.2 R8.1 RX.2 TX.2 U1.4 U1.6 U1.18 U2.2 U2.4 U_USB.4 U_USB.20 | length 2965.2
  Top Layer w15.75: v1(2340,3885) C5.1 ; R8.1 2475.95,5345.95 2549.05,5345.95 v1(2550,5345) ; U_USB.4 2615.43,3539.57 2640,3515 2640,3420.84 2649.22,3411.61 U_USB.20 2936.26,3411.61 2952.87,3395 v1(2955,3395) 2982.48,3367.52 RX.2 TX.2 ; v1(2710,4945) 2710.95,4944.05 2710.95,4890.95 R5.2 ; U1.4 2845.76,4396.17 2845.76,4339.24 2860,4325 v1(2880,4325) 2880.59,4325.59 2898.02,4325.59 2907.24,4334.82 U1.6 2907.24,4547.24 2938.74,4578.74 U1.18 ; v1(2925,4955) P4.2 ; C7.1 2956.46,4164.23 2965.68,4155 3009.5,4155 3024.5,4170 v1(3130,4170) ; v1(3090,3105) 3090.73,3105.73 C3.1@3164.27,3105.73 ; D1.1@3270.81,4821.4 3404.27,4821.4 3413.49,4830.62 3413.49,4863.49 v1(3415,4865) ; C8.2 U2.2 U2.4 3280,4915 3290,4905 3404.27,4905 3413.49,4895.77 v1@3413.49,4864.38
  Bottom Layer w15.75: J_NANO_2.4 v1(2135,3605)
D+: J2.2 J3.3 U_USB.15 | length 863
  Top Layer w10: J3.3 2774.41,3007.41 2802,3035 v1(2835,3035) 2889.14,3035 2895,3040.86 2895,3277.8 2889.14,3283.66 U_USB.15
  Bottom Layer w10: J2.2 2514.37,3035 v1(2835,3035)
D-: J2.1 J3.2 U_USB.16 | length 893
  Top Layer w10: J3.2 2748.82,3047.33 2760,3058.51 v1(2760,3060) ; U_USB.16 2848.13,3307.78 2892.22,3307.78 2940,3260 v1(2940,3195)
  Bottom Layer w10: J2.1 2479.37,3060 2762.67,3060 2772.67,3070 2934.14,3070 2940,3075.86 v1(2940,3195)
GND: C1.1 C2.1 C3.2 C5.2 C6.2 C7.2 C8.1 C9.2 CLK.1 J3.5 J3.6 J3.7 J3.8 J3.9 J3.10 J3.11 J_NANO_1.4 J_NANO_2.2 P4.6 PWR.1 PWR_IN.2 R4.1 SW1.3 U1.3 U1.5 U1.21 U2.1 U_USB.7 U_USB.18 U_USB.21 U_USB.25 U_USB.26 X1.2 X1.4 | length 5362.9
  Top Layer w15.75: v1(2130,5395) 2130,5298.27 SW1.3 ; v1(2275.05,4344.95) 2277.18,4344.95 2282.13,4340 2359.02,4340 X1.2 2363.5,4340 2405,4340 2420,4325 2420,4270 2442.24,4247.76 X1.4 ; v1@2314.05,3425.95 R4.1@2314.05,3579.05 ; v1(2450,5130) 2450.47,5129.53 2450.47,5070.47 PWR.1 ; v1(2469.34,3462.8) U_USB.7 ; J3.6 2580.73,2946.65 2571.51,2937.43 2571.51,2896.51 v1(2570,2895) 2571.51,2893.49 2571.51,2854.5 2580.73,2845.28 J3.9 J3.10 J3.11 2912.01,2850 2970.78,2850 2980,2859.22 2980,2937.43 2970.78,2946.65 J3.7 2869,2950 J3.5 ; C5.2 2746.38,3885 2770,3861.38 2770,3830 2780,3820 v1(2830,3820) 2930,3820 2940,3830 C2.1 ; U1.3 2813.88,4396.56 2813.88,4311.12 2844.25,4280.75 2909.25,4280.75 2925,4265 3095.66,4265 3104.88,4255.77 3104.88,4232.01 3085,4212.13 v1(3085,4210) C7.2 ; U_USB.18 2932.44,3360.43 2952.87,3340 v1(2955,3340) ; U_USB.21 2965.07,3437.2 2987.87,3460 v1(2990,3460) ; U_USB.25 2914.57,3539.57 v1(2945,3570) ; U_USB.26 2847.03,3565.53 2885.53,3565.53 v1(2945,3625) ; v1(2865,4955) 2864.42,4955 2852.14,4942.72 C1.1 2818.61,4941.33 2785.55,4941.33 2775,4930.77 2775,4900 2844.25,4830.75 U1.21 2844.25,4575.75 2875.75,4544.25 U1.5 ; PWR_IN.2 3106.75,5502.72 v1@3138.48,5470.98 ; C6.2 v1(3005,3105) 3005,3020 3025,3000 3220,3000 3240,3020 3240,3135 3211.46,3163.54 C3.2 ; v1(3140,5470) C8.1@3278.54,5470 ; CLK.1 3275.24,4475.24 3339.76,4475.24 v1(3340,4475) ; C8.1 3357.87,5468.54 3370.55,5455.86 U2.1 ; C9.2 3300,4190 3318.49,4171.51 3348.49,4171.51 v1(3350,4170)
  Top Layer w21.65: v1@3138.48,5470.98 v1@3139.47,5470
  Bottom Layer w15.75: J_NANO_2.2 v1(2130,3405) ; v1(2630,5050) P4.6 ; v1(3425,3605) J_NANO_1.4
  other v1: 2980,2895 2315,3425
MISO: J_NANO_1.15 P4.1 U1.16 | length 1258.4
  Top Layer w10: U1.16 3281.55,4675.24 3291.31,4685 3405,4685 3425,4705 J_NANO_1.15
  Bottom Layer w10: P4.1 3070,5005 3275,5005 3295,4985 v1(3295,4685)
MOSI: J_NANO_1.14 P4.4 U1.15 | length 1390.4
  Top Layer w10: P4.4 2834.76,5059.76 2834.76,5079.76 2850,5095 3140,5095 3176.2,5058.8 3176.2,4966.34 3215,4927.54 3215,4835.61 3200,4820.61 v1(3200,4725) ; U1.15 3029.93,4641.13 3065.43,4641.13 3066.57,4640 3395,4640 3435,4600 3530,4600 J_NANO_1.14
  Bottom Layer w10: v1(3200,4725) 3258.19,4666.81 3258.19,4641.81 v1(3260,4640)
NetC1_2: C1.2 J_NANO_2.13 U1.20 | length 1346.5
  Top Layer w10: J_NANO_2.13 v1(2120,4505) ; C1.2 2824.84,4902.44 2827.56,4902.44 2875.37,4854.63 2875.37,4732.7 U1.20
  Bottom Layer w10: v1(2120,4505) 2120,4685 2340,4905 2825,4905 v1(2875,4855)
NetC4_1: C4.1 U_USB.2 | length 1172.6
  Top Layer w10: v1(2295,3675) v1(2295,3755) ; v1(2295,4050) v1(2295,4245) ; C4.1 2386.8,4435.92 2399.08,4435.92 2420,4415 2420,4403.69 2425,4398.69 v1(2425,4395) ; v1(2470,3590) 2470.37,3590.37 2552.97,3590.37 U_USB.2
  Bottom Layer w10: v1(2295,3675) 2295,3615 2320,3590 v1(2470,3590) ; v1(2295,3755) v1(2295,4050) ; v1(2295,4245) 2295,4265 v1(2425,4395)
NetC4_2: C4.2 J_NANO_2.6 U1.22 | length 1799.1
  Top Layer w10: v1(2120,4050) 2120,4250 2280,4410 2317.28,4410 C4.2 2346.14,4441.14 2346.14,4503.86 v1(2345,4505) ; v1(2795,4825) 2795,4822.6 2812.76,4804.84 U1.22
  Bottom Layer w10: J_NANO_2.6 2090,3805 2120,3835 v1(2120,4050) ; v1(2345,4505) 2345,4805 2415,4875 2742.33,4875 2792.33,4825 v1(2795,4825)
NetCLK_2: CLK.2 R1.2 | length 549.2
  Top Layer w10: R1.2 3135,4810 v1(3165,4780) ; CLK.2@3275.47,4535 v1(3350,4535)
  Bottom Layer w10: v1(3165,4780) 3165,4685 3260,4590 3364.14,4590 3370,4584.14 3370,4555 v1(3350,4535)
NetF1_1: F1.1 J3.1 | length 238.1
  Top Layer w10: F1.1 2616.54,3033.46 2630,3020 2705,3020 2719.37,3005.63 2719.37,2953.86 J3.1
NetJ_NANO_1_5: J_NANO_1.5 U1.32 | length 1552.4
  Top Layer w10: U1.32 2625.86,4454.76 2620,4448.91 2620,4410 2680,4350 2680,4285 2705,4260 2890,4260 2920,4230 2920,4135 2937.13,4117.87 3202.13,4117.87 3360,3960 3360,3725 3380,3705 J_NANO_1.5
NetJ_NANO_1_6: J_NANO_1.6 U1.1 | length 1751.3
  Top Layer w10: v1(2720,4300) 2720,4341.34 2749.76,4371.1 U1.1 ; v1(3155,4340) 3230,4265 3254.14,4265 3260,4270.86 3260,4295 3270,4305 3370,4305 3390,4285 3390,3830 3415,3805 J_NANO_1.6
  Bottom Layer w10: v1(2720,4300) 2720,4200 2747.87,4172.13 3027.13,4172.13 3045,4190 3045,4315 3100,4370 3145,4370 3155,4360 v1(3155,4340)
NetJ_NANO_1_7: J_NANO_1.7 U1.2 | length 1392
  Top Layer w10: v1(2780,4300) 2781.26,4301.26 U1.2 ; v1(3015,4350) 3017.67,4350 3027.67,4360 3090,4360 3338.19,4111.81 3338.19,4051.81 v1(3340,4050)
  Bottom Layer w10: v1(2780,4300) 2780,4210 2800,4190 2995,4190 3015,4210 v1(3015,4350) ; v1(3340,4050) 3340,3940 3375,3905 J_NANO_1.7
NetJ_NANO_1_8: J_NANO_1.8 U1.9 | length 858
  Top Layer w10: U1.9 3110.24,4454.76 3215,4350 3385,4350 3422.13,4312.87 3422.13,4032.87 3450,4005 J_NANO_1.8
NetJ_NANO_1_9: J_NANO_1.9 U1.10 | length 803.3
  Top Layer w10: U1.10 3158.74,4486.26 3180,4465 3180,4430 3225,4385 3405,4385 3440,4350 3440,4150 3485,4105 J_NANO_1.9
NetJ_NANO_1_10: J_NANO_1.10 U1.11 | length 751.5
  Top Layer w10: U1.11 3182.24,4517.76 3200,4500 3200,4450 3240,4410 3425,4410 3462.87,4372.13 3462.87,4227.13 3485,4205 J_NANO_1.10
NetJ_NANO_1_11: J_NANO_1.11 U1.12 | length 701.5
  Top Layer w10: U1.12 3205.75,4549.25 3230,4525 3230,4455.28 3250.28,4435 3445,4435 3480.75,4399.25 3480.75,4310.86 3486.61,4305 J_NANO_1.11
NetJ_NANO_1_12: J_NANO_1.12 U1.13 | length 580.5
  Top Layer w10: U1.13 3359.25,4580.75 J_NANO_1.12
NetJ_NANO_1_13: J_NANO_1.13 U1.14 | length 552.1
  Top Layer w10: U1.14 3057.58,4612.24 3064.83,4605 3370,4605 3465,4510 3530,4510 J_NANO_1.13
NetJ_NANO_2_5: J_NANO_2.5 U1.19 | length 4806.1
  Top Layer w10: U1.19 2907.24,4872.24 v1(3080,5045) ; v1(3261.57,3359.01) 3261.57,3248.43 3315,3195 3570,3195 3610,3235 3610,5055 3570,5095 v1(3480,5095)
  Bottom Layer w10: J_NANO_2.5 3175,3705 3260,3620 3260,3360.58 v1(3261.57,3359.01) ; v1(3080,5045) 3130,5095 v1(3480,5095)
NetJ_NANO_2_7: J_NANO_2.7 U1.28 | length 1157.6
  Top Layer w10: J_NANO_2.7 2220,3905 2235,3920 v1(2235,4245) ; v1(2525,4560) 2528.49,4560 2549.24,4580.75 U1.28
  Bottom Layer w10: v1(2235,4245) 2236.81,4246.81 2236.81,4271.81 v1(2525,4560)
NetJ_NANO_2_8: J_NANO_2.8 U1.27 | length 1095.6
  Top Layer w10: J_NANO_2.8 2150,4005 2177.61,4032.61 2177.61,4242.39 v1(2175,4245) ; v1(2525,4615) 2526.38,4613.62 2691.3,4613.62 U1.27
  Bottom Layer w10: v1(2175,4245) 2175,4310 2340,4475 2390,4475 2518.54,4603.54 2518.54,4604.86 2525,4611.31 v1(2525,4615)
NetJ_NANO_2_9: J_NANO_2.9 U1.26 | length 1194.6
  Top Layer w10: v1(2532.55,4412.55) 2464.33,4480.76 2464.33,4637.88 2470.18,4643.74 U1.26
  Bottom Layer w10: J_NANO_2.9 2345,4105 2532.55,4292.55 v1(2532.55,4412.55)
NetJ_NANO_2_10: J_NANO_2.10 U1.25 | length 1210.5
  Top Layer w10: v1(2475,4420) 2430,4465 2430,4665 2440.24,4675.24 U1.25
  Bottom Layer w10: J_NANO_2.10 2085,4140 2335,4140 2475,4280 v1(2475,4420)
NetJ_NANO_2_11: J_NANO_2.11 U1.24 | length 970.8
  Top Layer w10: J_NANO_2.11 2095,4305 v1(2395,4605) ; v1(2715,4780) 2743.91,4780 2749.76,4774.14 U1.24
  Bottom Layer w10: v1(2395,4605) 2540,4750 2685,4750 v1(2715,4780)
NetJ_NANO_2_12: J_NANO_2.12 U1.23 | length 1046.5
  Top Layer w10: J_NANO_2.12 2120,4405 v1(2405,4690) ; v1(2675,4820) 2745,4820 2781.26,4783.74 U1.23
  Bottom Layer w10: v1(2405,4690) 2405,4770 2415,4780 2635,4780 v1(2675,4820)
NetPWR_2: PWR.2 R8.2 | length 217.6
  Top Layer w10: R8.2 2475,5230 2510,5195 PWR.2
NetR2_2: R2.2 U_USB.1 | length 912.1
  Top Layer w10: U_USB.1 2499.52,3616.34 2490,3625.86 2490,3655 2615,3780 2615,3915 2635,3935 2810,3935 2826.14,3951.14 2826.14,4137.07 2832,4142.93 2861.05,4142.93 2866.91,4148.79 R2.2
NetR3_2: R3.2 U_USB.5 | length 953.1
  Top Layer w10: U_USB.5 2551.87,3515.45 2484.55,3515.45 2430,3570 2430,3725 2476.25,3771.25 2563.47,3771.25 2590,3797.78 2590,3925 2630,3965 2730,3965 2750,3985 2750,4085 2763.77,4098.77 2791.86,4098.77 R3.2
NetR6_1: R6.1 RX.1 | length 241.7
  Top Layer w10: RX.1 3107.89,3432.48 3117.39,3441.99 3117.39,3447.39 v1(3120,3450) ; R6.1 3058.09,3545 v1(3120,3545)
  Bottom Layer w10: v1(3120,3450) v1(3120,3545)
NetR6_2: R6.2 U_USB.23 | length 296.5
  Top Layer w10: U_USB.23 2928.39,3488.39 3000,3560 3000,3616.05 3005.86,3621.91 R6.2
NetR7_1: R7.1 TX.1 | length 115.6
  Top Layer w10: TX.1 R7.1
NetR7_2: R7.2 U_USB.22 | length 472.3
  Top Layer w10: U_USB.22 2932.89,3462.8 2975.09,3505 3140,3505 3151.91,3516.91 3151.91,3616.05 3157.77,3621.91 R7.2
PB5_SCK: J_NANO_2.15 P4.3 R1.1 U1.17 | length 2495.5
  Top Layer w10: J_NANO_2.15 2020,5430 2040,5450 2635,5450 2825,5260 P4.3 ; U1.17 2970.24,4805.24 v1(3015,4850) 3081.91,4916.91 R1.1
  Bottom Layer w10: P4.3 2825,5110 2835,5100 2945,5100 3065,4980 3065,4900 v1(3015,4850)
PB6: U1.7 X1.3 | length 1110.7
  Top Layer w10: X1.3 2361.26,4175.86 2367.12,4170 2430,4170 v1(2455,4145) ; v1(2505,4055) 2520,4040 2630,4040 2675,4085 v1(2675,4180) ; U1.7 2938.74,4321.26 2940,4320 v1(2940,4310)
  Bottom Layer w10: v1(2455,4145) 2505,4095 v1(2505,4055) ; v1(2675,4180) 2675,4315 2695,4335 2809.14,4335 2864.14,4280 2910,4280 v1(2940,4310)
PB7: U1.8 X1.1 | length 1294.1
  Top Layer w10: X1.1 2521.5,4345 2585,4345 2600,4330 v1(2600,4240) ; U1.8 2970.24,4318.25 2988.49,4300 v1(3100,4300)
  Bottom Layer w10: v1(2600,4240) 2600,4150 2615,4135 3160,4135 3175,4150 3175,4290 3162.39,4302.61 3102.61,4302.61 v1(3100,4300)
PD0_RXD: J_NANO_1.1 R2.1 U1.30 | length 2144
  Top Layer w10: U1.30 2582.76,4517.76 2570,4505 2570,4455 2584.63,4440.37 2584.63,4415.37 2660,4340 2660,4275 2692.87,4242.13 2782.87,4242.13 2793.09,4231.91 R2.1 2790.37,4192.28 2790.37,4155.37 2777.16,4142.16 2712.16,4142.16 2700,4130 v1(2700,4090) ; v1(2900,4045) 3030,4045 3050,4025 3050,3850 3260,3640 3260,3480 3435,3305 J_NANO_1.1
  Bottom Layer w10: v1(2700,4090) 2700,4050.86 2705.86,4045 v1(2900,4045)
PD1_TXD: J_NANO_1.2 R3.1 U1.31 | length 2277.3
  Top Layer w10: v1(2605,4480) 2608.69,4480 2614.95,4486.26 U1.31 ; R3.1 2942.48,4100 2952.39,4090.09 2952.39,4082.61 v1(2955,4080) 3214.72,4080 3340,3954.72 3340,3435 3370,3405 J_NANO_1.2
  Bottom Layer w10: v1(2605,4480) 2570,4445 2570,4050 2615,4005 2945,4005 2955,4015 v1@2955,4085
RESET: J_NANO_1.3 J_NANO_2.3 P4.5 R5.1 SW1.2 U1.29 | length 4877
  Top Layer w10: J_NANO_2.3 2220,3505 2240,3525 2240,3890 2445,4095 2625,4095 2640,4110 2640,4334.72 2566.75,4407.97 2566.75,4428.25 2525,4470 v1(2525,4505) 2569.25,4549.25 U1.29 ; SW1.2 2386.85,4903.15 2405,4885 2405,4745 2435,4715 v1(2575,4715) 2620,4715 2638.09,4733.09 R5.1 2638.09,4936.91 2570,5005 2570,5130 2580.45,5140.45 2715.45,5140.45 P4.5
  Bottom Layer w10: J_NANO_2.3 2175,3505 2195,3485 2195,3330 2209.68,3315.32 3420.32,3315.32 3445,3340 3445,3485 3465,3505 J_NANO_1.3 ; v1(2525,4505) 2575,4555 v1(2575,4715)
VIN: J_NANO_2.1 PWR_IN.1 U2.3 | length 3765.2
  Top Layer w19.68: PWR_IN.1 2747.05,5387.95 2780,5355 3165,5355 3189.45,5330.55 U2.3
  Bottom Layer w19.68: J_NANO_2.1 1955,3305 1935,3325 1935,4765 1970,4800 2180,4800 2245,4865 2245,5415 2420,5590 2727.04,5590 2747.05,5569.99 PWR_IN.1
VUSB: C2.2 C9.1 D1.2 F1.2 | length 3229.9
  Top Layer w15.75: v1(2560,2990) 2560,3120 2580,3140 2670,3140 2685,3125 2685,3101.54 F1.2 ; C2.2 3257.87,3885 3262.87,3890 v1(3265,3890) ; D1.2 3372.08,4745.79 3387.87,4730 v1(3390,4730) ; C9.1 3300.98,4257.72 3302.95,4259.69 3310.06,4259.69 3310.38,4260 v1(3355,4260) ; v1(3320,3255) v1(3320,3360)
  Bottom Layer w15.75: v1(2560,2990) 2580,2970 3280,2970 3320,3010 v1(3320,3255) ; v1(3320,3360) 3320,3625 3205,3740 3205,3830 v1(3265,3890) 3265,3892.13 3290,3917.13 3290,4195 v1(3355,4260) 3355,4310 3410,4365 3410,4710 v1(3390,4730)
pads on no net: J3.4 PWR_IN. R4.2 SW1.1 SW1.4 U_USB.3 U_USB.6 U_USB.8 U_USB.9 U_USB.10 U_USB.11 U_USB.12 U_USB.13 U_USB.14 U_USB.19 U_USB.24 U_USB.27 U_USB.28

## Polygon pours and split planes (outlines as drawn)
no net on GND_plane (split plane): 3634.9,2750.1 1920.1,2750.1 1920.1,5804.9 3634.9,5804.9
no net on 5V_plane (split plane): 3634.9,2750.1 1920.1,2750.1 1920.1,5804.9 3634.9,5804.9

## Silkscreen, mask and mechanical layers (free items; w line width, h text height)
Top Overlay:
  text "D-" at 2410,3050 h60 r90
Mechanical 1:
  the board outline again, w10

## Text inside footprints (layer, text, board x,y; h text height)
C2: Top Overlay "+" at 2857.32,3905.57 h48 r180
C5: Top Overlay "+" at 2417.09,3905.57 h48 r180